# Altium PCB ebox_board_v3.PcbDoc
Units mm, origin at the board's own origin, x right, y up, seen from the top; angles counter-clockwise.
Board outline 96.52 x 82.55 mm, 2 copper layers (Top Layer, Bottom Layer); 28 components, 14 nets, 82 pads, 13 vias.
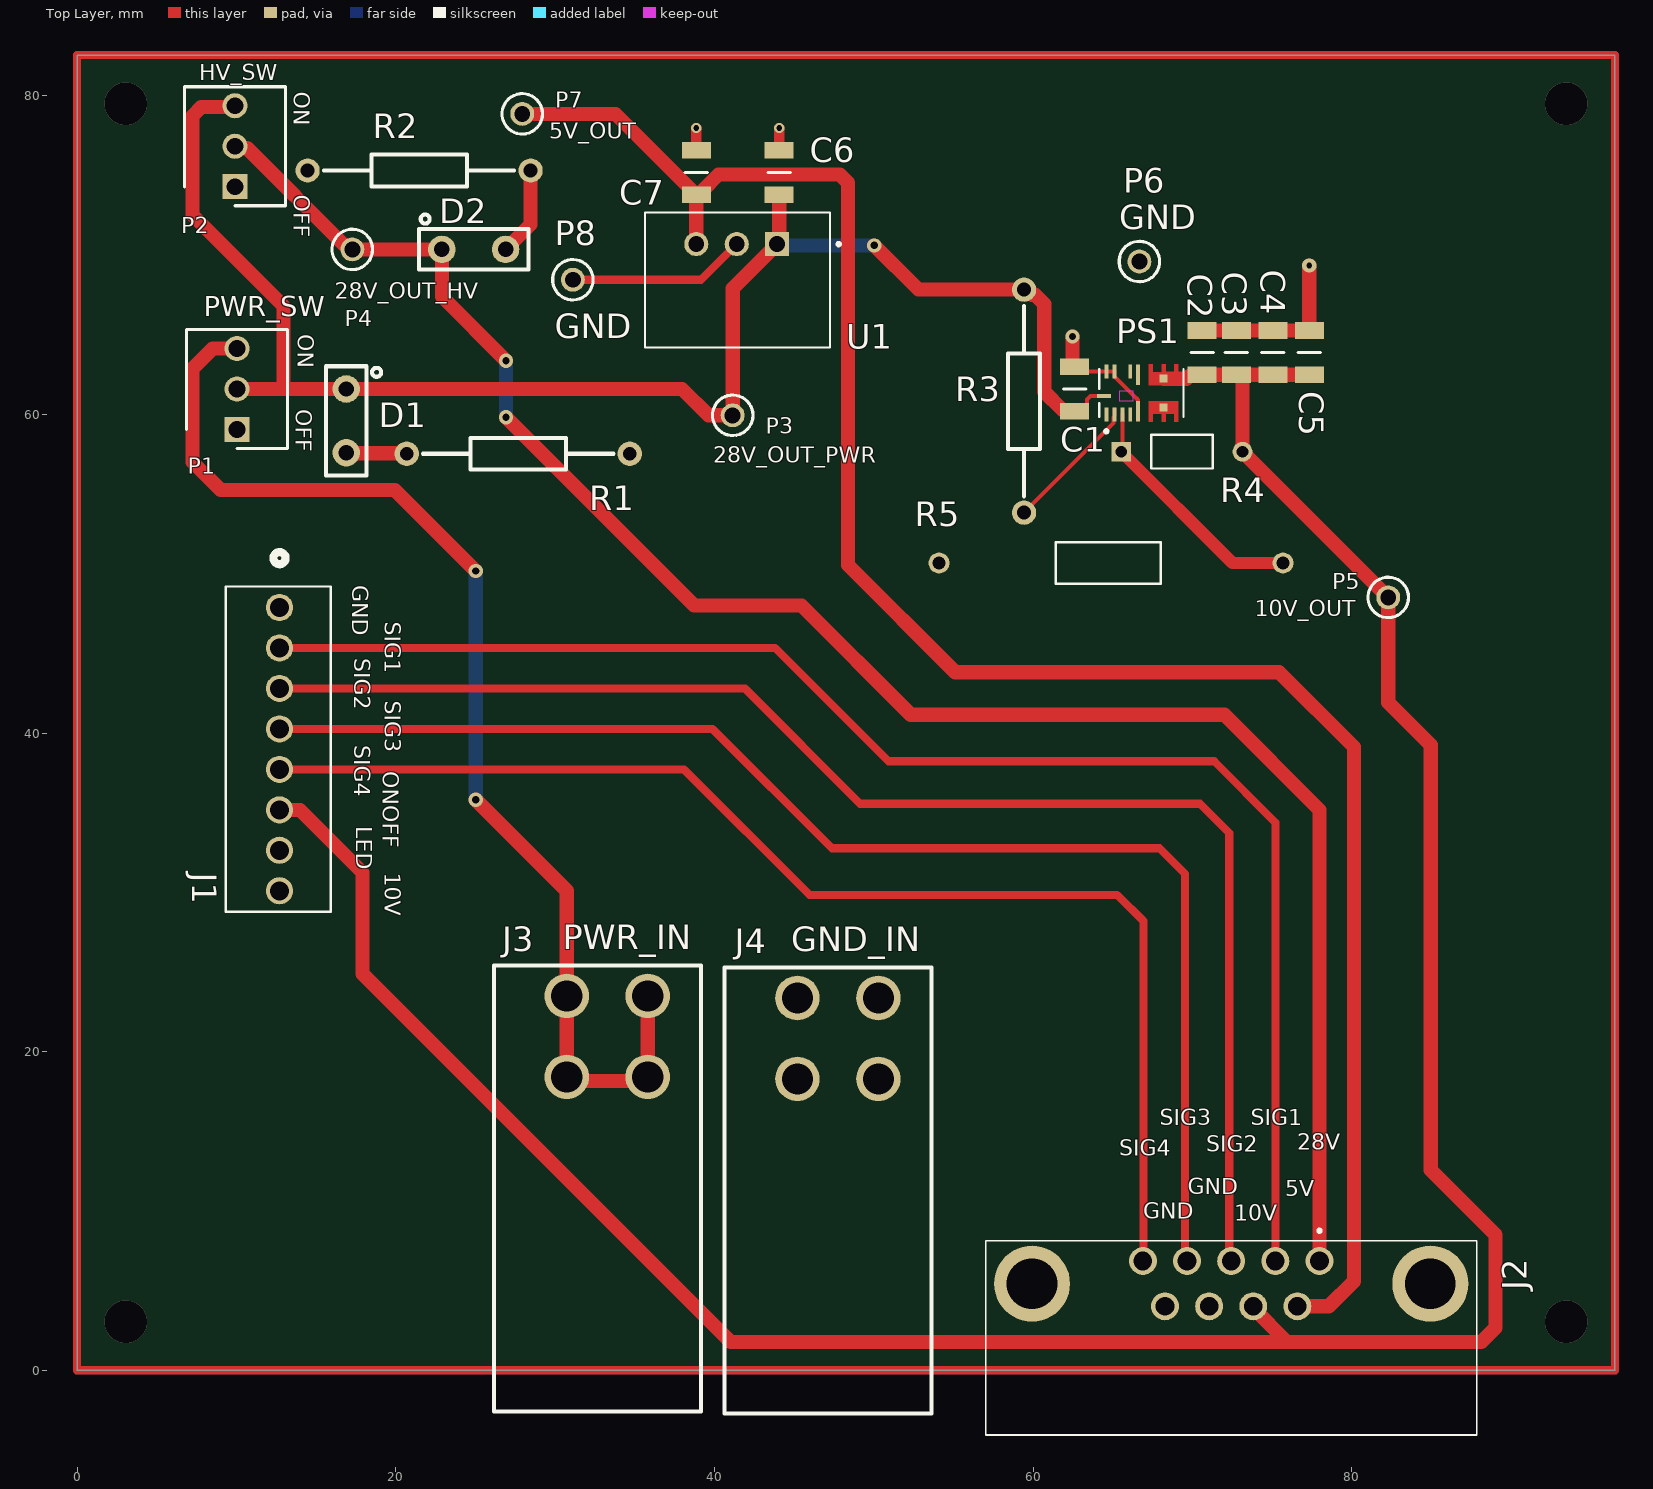
[diagram p0: Top Layer view]
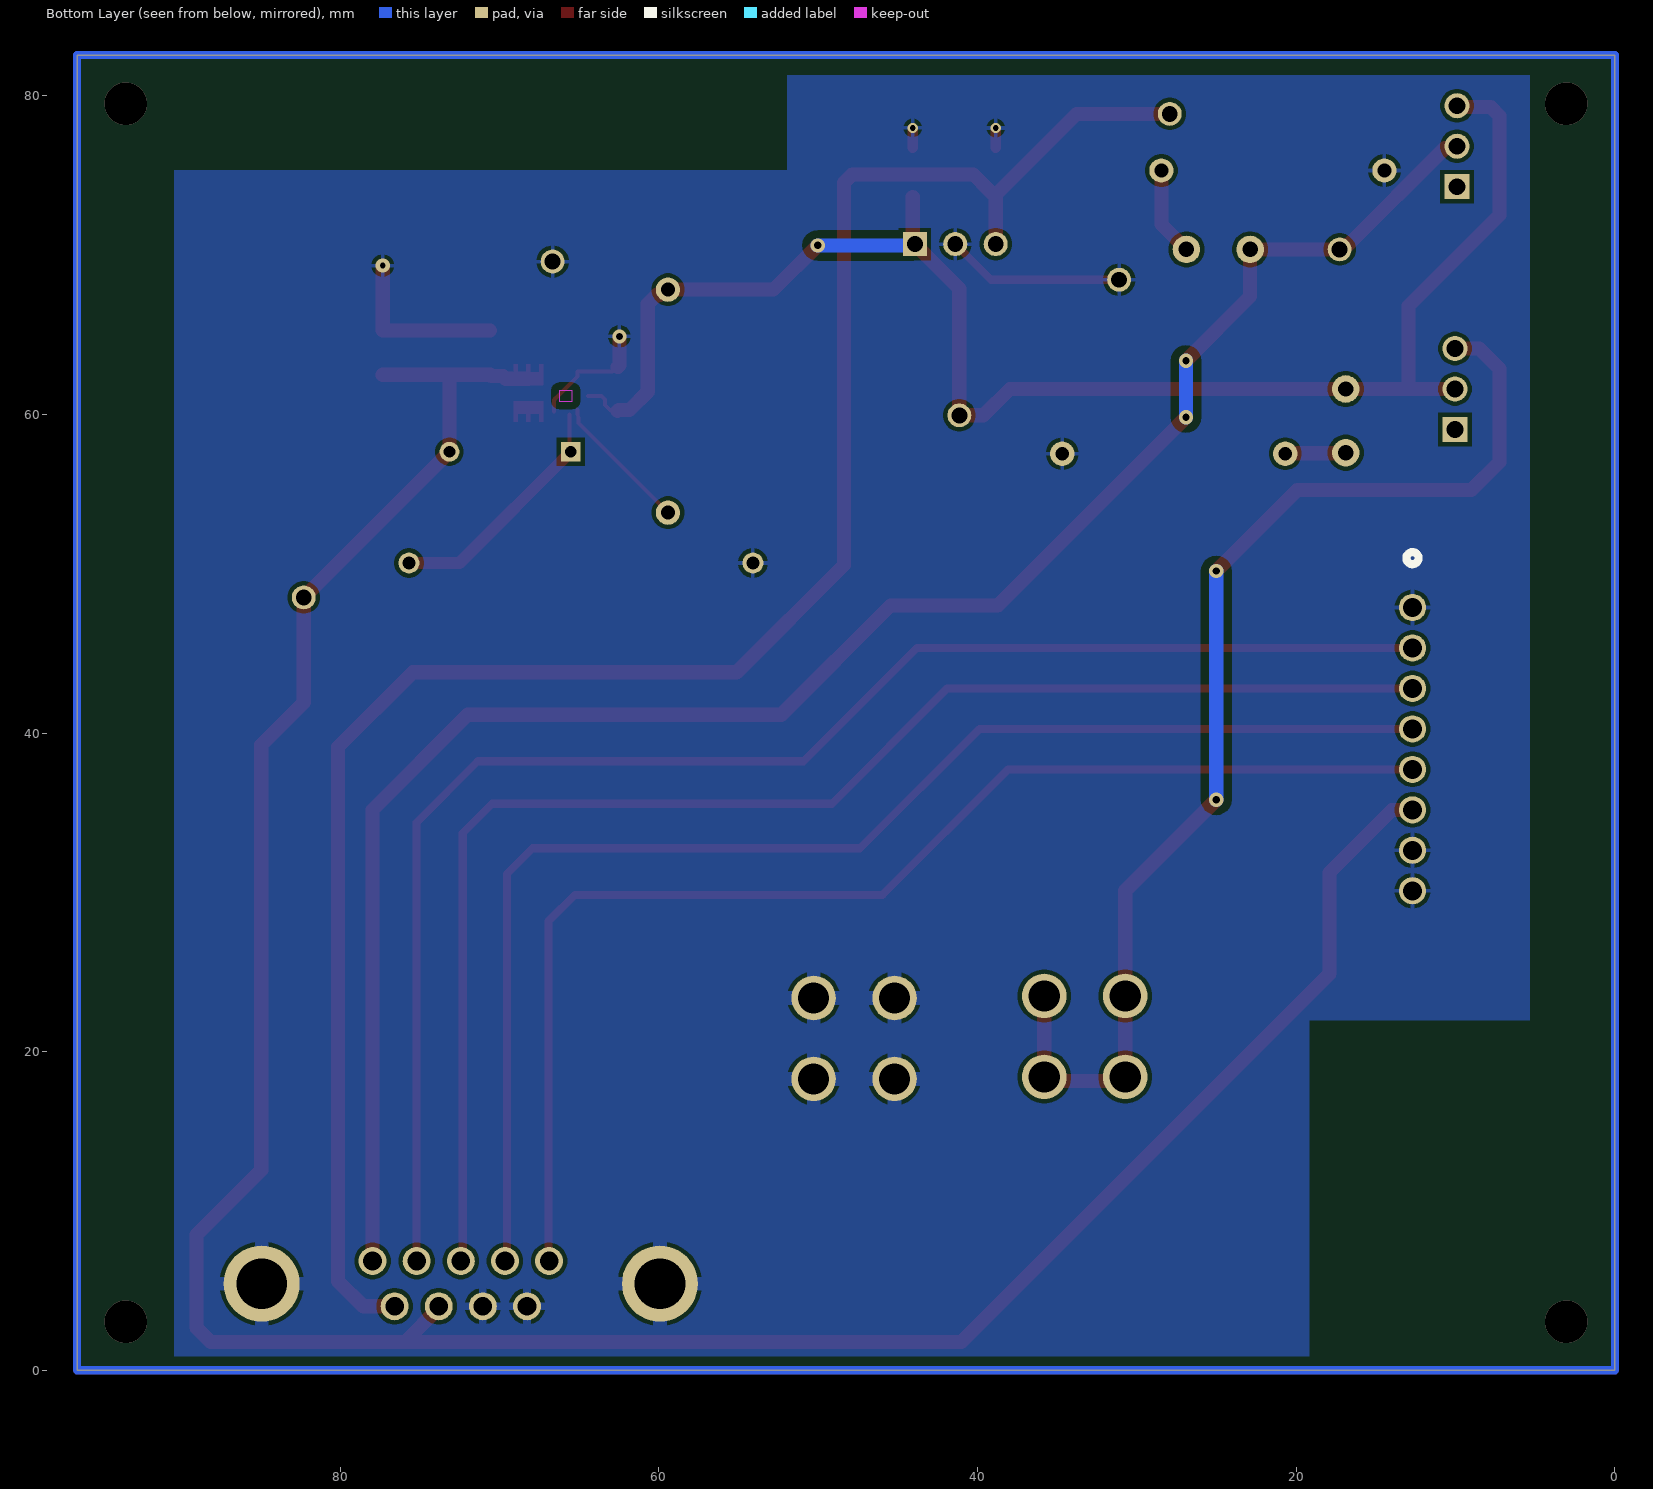
[diagram p1: Bottom Layer view, seen from below]

## Layer stack, top to bottom
Top Solder: solder mask 0.0102, Solder Resist, Dk 3.5
Top Layer: signal copper 0.0356
Dielectric 1: dielectric 0.32, FR-4, Dk 4.8
Bottom Layer: signal copper 0.0356
Bottom Solder: solder mask 0.0102, Solder Resist, Dk 3.5

## Board outline
0,0 0,82.55 96.52,82.55 96.52,0

## Design rules (kind name [scope] priority, off if disabled: settings)
Clearance polygon_clearance [All] p1: gap=0.254 ignorepadtopadclearanceinfootprint=FALSE except(0: Arc-Hole Track-Hole SMDPad-Hole THPad-Hole Via-Hole Fill-Hole Poly-Hole Region-Hole Text-Hole; 0.508: Arc-Arc Arc-Track Arc-Fill Arc-Poly Arc-Region Track-Track Track-Fill Track-Poly Track-Region Fill-Fill Fill-Poly Fill-Region Poly-Poly Poly-Region Region-Region)
Clearance [All] p2: gap=0.254 ignorepadtopadclearanceinfootprint=FALSE except(0: Arc-Hole Track-Hole SMDPad-Hole THPad-Hole Via-Hole Fill-Hole Poly-Hole Region-Hole Text-Hole)
Clearance MO [InNamedPolygon('GND_L02_P000')] p3 off: gap=0.254 ignorepadtopadclearanceinfootprint=FALSE except(0: Arc-Hole Track-Hole SMDPad-Hole THPad-Hole Fill-Hole Poly-Hole Region-Hole Text-Hole; 3.81: Arc-Via Track-Via SMDPad-Via THPad-Via Via-Via Via-Fill Via-Poly Via-Region Via-Text Via-Hole)
Clearance MOUNTING_1 [InNamedPolygon('GND_L02_P000') vs InNet('No Net')] p4 off: gap=0.254 ignorepadtopadclearanceinfootprint=FALSE except(0: Arc-Hole Track-Hole SMDPad-Hole THPad-Hole Fill-Hole Poly-Hole Region-Hole Text-Hole; 1.27: Arc-Via Track-Via SMDPad-Via THPad-Via Via-Via Via-Fill Via-Poly Via-Region Via-Text Via-Hole)
Clearance Mounting [InNamedPolygon('GND_L02_P000') vs InNet('No Net')] p5 off: gap=0.254 ignorepadtopadclearanceinfootprint=FALSE except(0: Arc-Hole Track-Hole SMDPad-Hole THPad-Hole Via-Hole Fill-Hole Poly-Hole Region-Hole Text-Hole)
PolygonConnect [All] p1: connectstyle=Relief reliefconductorwidth=0.254 reliefentries=4 polygonreliefangle="90 Angle" airgapwidth=0.254
RoomDefinition top_ebox_v3 [InComponentClass('top_ebox_v3')] p1 off: confinementstyle=ConfineIn formatcopy=TRUE lockcomponents=FALSE outline 5.969,-11.43 89.154,-11.43 89.154,81.153 5.969,81.153
RoomDefinition U_power_ebox [InComponentClass('U_power_ebox')] p2 off: confinementstyle=ConfineIn formatcopy=TRUE lockcomponents=FALSE outline 26.289,46.863 83.947,46.863 83.947,80.518 26.289,80.518
RoutingVias [All] p1: holewidth=0.711 width=1.27 viastyle="Through Hole" minholewidth=0.711 minwidth=1.27 maxholewidth=0.711 maxwidth=1.27
SolderMaskExpansion [All] p1: expansion=0.102 istentingtop=FALSE
Width [All] p1 off: maxlimit=0.254 minlimit=0.254 preferedwidth=0.254
30 further rules are at their usual default settings.

## Classes and differential pairs
component class U_power_ebox: C1 C2 C3 C4 C5 C6 C7 P5 P6 P7 P8 PS1 R3 R4 R5 U1
component class top_ebox_v3: D1 D2 J1 J2 J3 J4 P1 P2 P3 P4 R1 R2

## Components (designator, comment, footprint, x,y, rotation, side; value= is the part's Value field where it differs from the comment)
C1 "10u" "10UF CER SMD" 62.611,61.595 r90 top
C2 "10u" "10UF CER SMD" 70.612,63.881 r270 top
C3 "10u" "10UF CER SMD" 72.771,63.881 r270 top
C4 "10u" "10UF CER SMD" 75.057,63.881 r270 top
C5 "10u" "10UF CER SMD" 77.343,63.881 r270 top
C6 "10u" "10UF CER SMD" 44.069,75.184 r270 top
C7 "10u" "10UF CER SMD" 38.862,75.184 r270 top
D1 "LED" "LED 12V THRU HOLE" 16.891,59.595 r270 top
D2 "LED" "LED 12V Thru Hole" 24.892,70.358 r0 top
J1 "ARDUINO_IO" "1X8 MOLEX HEADER - FEMALE" 12.7,47.879 r270 top
J2 "EBOX_OUT" "9-PIN D-SUB" 77.978,6.858 r0 top
J3 "PWR_IN" "BANANA JACK" 30.734,23.495 r90 top
J4 "GND_IN" "BANANA JACK" 45.212,23.368 r90 top
P1 "PWR_SW" "3X1 KK MOLEX" 10.033,59.055 r90 top
P2 "HV_SW" "3X1 KK MOLEX" 9.906,74.295 r90 top
P3 "28V_OUT_PWR" KSTN-5003 41.148,59.944 r0 top
P4 "28V_OUT_HV" KSTN-5003 17.272,70.358 r0 top
P5 "10V_OUT" KSTN-5003 82.296,48.514 r0 top
P6 "GND" KSTN-5003 66.675,69.596 r0 top
P7 "5V_OUT" KSTN-5003 27.94,78.867 r0 top
P8 "GND" KSTN-5003 31.115,68.453 r0 top
PS1 "*" "10V STEP-DOWN" 66.802,61.341 r90 top
R1 "1.5k" "GENERAL RESISTOR" 27.686,57.531 r0 top
R2 "1.5k" "GENERAL RESISTOR" 21.463,75.311 r180 top
R3 "100K" "GENERAL RESISTOR" 59.436,60.833 r90 top
R4 "75K" 75K 65.532,57.658 r0 top
R5 "6.65K" 6.65K 95.885,50.673 r180 top
U1 "R-78E5.0-1.0" "STEP-DOWN CONVERTER" 41.402,68.438 r180 top

## Footprints (in the part's own frame and the unit in brackets; to place one, negate y for a bottom-side part, rotate by r counter-clockwise, add the part's x,y. Pads: shape width x height; smd on the part's side, far side on the other; paste and mask are expansions set on the pad)
"1X8 MOLEX HEADER - FEMALE" [mil] "CONN_171856-0008_MOL"
  round 67 hole 47 mask+0: 1(0,0) 2(100,0) 3(200,0) 4(300,0) 5(400,0) 6(500,0) 7(600,0) 8(700,0)
  silkscreen extent -137,-133 752,127, body extent 0,0 10,10, height 10
"3X1 KK MOLEX" [mm] "22112032 - HDRV3W87P0X254_1X3_747X635X1105P"
  rect 1.575x1.575 hole 1.05: 1(0,0)
  round 1.575 hole 1.05: 2(2.54,0) 3(5.08,0)
  silkscreen extent -1.19,-3.17 6.27,3.18, body extent -1.19,-3.24 6.27,3.11, height 10.65
6.65K [mil]
  round 52 hole 32 mask+0: 1(795,0) 2(1645,0)
  silkscreen extent 1097,-51 1357,52
"9-PIN D-SUB" [mm] "23117651"
  round 1.755 hole 1.17: 1(0,0) 2(-2.77,0) 3(-5.54,0) 4(-8.31,0) 5(-11.08,0) 6(-1.385,-2.84) 7(-4.155,-2.84) 8(-6.925,-2.84) 9(-9.695,-2.84)
  round 4.77 hole 3.18: MH1(-18.04,-1.42) MH2(6.96,-1.42)
  silkscreen extent -20.95,-10.92 9.86,2, body extent -20.95,-16.92 9.87,1.28, height 12.63
"10UF CER SMD" [mm] "CAPC3216X180N"
  rect 1.05x1.82 smd: 1(-1.39,0) 2(1.39,0)
  silkscreen extent 0,-0.7 0,0.7, body extent -1.6,-0.8 1.6,0.8, height 1.8
"10V STEP-DOWN" [mm]
  rect 0.9x0.25 smd: 1(-1.35,2.2) 2(-1.35,1.7) 3(-1.35,1.2) 4(-1.35,0.7) 13(1.35,0.7) 14(1.35,1.7) 15(1.35,2.2)
  rect 1.3x0.25 smd: 5(-1.15,0.2) 12(1.15,0.2)
  rect 0.5x0.5 smd paste-1 mask+0: 6_7_8(-0.9,-1.4) 9_10_11(0.9,-1.4)
  rect 0.25x0.9 smd: 16(-0.175,2.35)
  Top Layer region: -0.5,-2.325 -1.8,-2.325 -1.8,-2.075 -1.3,-2.075 -1.3,-1.525 -1.8,-1.525 -1.8,-1.275 -1.3,-1.275 -1.3,-0.725 -1.8,-0.725 -1.8,-0.475 -0.5,-0.475
  Top Layer region: 1.8,-0.725 1.3,-0.725 1.3,-1.275 1.8,-1.275 1.8,-1.525 1.3,-1.525 1.3,-2.075 1.8,-2.075 1.8,-2.325 0.5,-2.325 0.5,-0.475 1.8,-0.475
  Keep-Out Layer region: 0.15,0.55 -0.5,0.55 -0.5,1.35 0.15,1.35
  Keep-Out Layer region: 0.15,0.55 -0.5,0.55 -0.5,1.35 0.15,1.35
  silkscreen extent -2.5,-2.65 1.5,2.65
75K [mil]
  rect 49x49 hole 29 mask+0: 1(0,0)
  round 49 hole 29 mask+0: 2(300,0)
  silkscreen extent 74,-42 226,42, body extent 0,0 10,10, height 10
"BANANA JACK" [mil] "Female"
  round 110 hole 77: 1(0,0) 2(0,-200) 3(-200,-200) 4(-200,0)
  silkscreen extent -1027,-332 75,180
"GENERAL RESISTOR" [mil]
  round 60 hole 34.17: 1(-275.59,0) 2(275.59,0)
  silkscreen extent -235,-39 235,39
KSTN-5003 [mm] "Test Point, Through Hole, Dia 2.54mm"
  round 1.5 hole 1: 1(0,0)
  silkscreen extent -1.27,-1.27 1.27,1.27, body extent -1.27,-1.27 1.27,1.27, height 4.57
"LED 12V THRU HOLE" [mm] "609-1112-130F"
  round 1.727 hole 0.965: 1(-2,0) 2(2,0)
  silkscreen extent -3.43,-1.27 3.43,2.19
"LED 12V Thru Hole" [mm] "609-1112-130F"
  round 1.727 hole 0.965: 1(-2,0) 2(2,0)
  silkscreen extent -3.43,-1.27 3.43,2.19
"STEP-DOWN CONVERTER" [mm] "CONV_R-78E5.0-1.0"
  rect 1.508x1.508 hole 1: 1(-2.54,-2.25)
  round 1.508 hole 1: 2(0,-2.25) 3(2.54,-2.25)
  silkscreen extent -6.5,-4.25 5.75,4.25

## Part data
C1 C2 C3 C4 C5 C6 C7: library part "Capacitor - Ceramic"
J1: library part 207843-0008, "KK Molex 1x8 Header", Manufacturer_Name=Molex, Mouser Part Number=538-207843-0008, Datasheet Link=https://www.molex.com/pdm_docs/sd/2078430008_sd.pdf, Height=6.95mm, Manufacturer_Part_Number=207843-0008, Mouser Price/Stock=https://www.mouser.co.uk/ProductDetail/Molex/207843-0008?qs=XeJtXLiO41QJV3n1oae5pg%3D%3D
J2: library part 2311765-1, "Connector", Manufacturer_Name="TE Connectivity", Mouser2 Part Number=571-2311765-1, Datasheet Link=https://componentsearchengine.com//2311765-1.pdf, Height=12.8mm, Manufacturer_Part_Number=2311765-1, Mouser2 Price/Stock=https://www.mouser.com/Search/Refine.aspx?Keyword=571-2311765-1
J3 J4: library part "Banana Jack", "Female"
P1 P2: library part "KK 254 1x3 male header", "22112032"
P3 P4 P5 P6 P7 P8: library part CMP-002-00037-2, "Test Point, Orange, Height 4.6 mm, Tail Length 3 mm, 1-Pin THD, RoHS", Case/Package=5003, Colour=Orange, Manufacturer=Keystone, Package Description="1-Pin Through Hole Device, Dia 2.54 mm", Package Quantity=10, Connector Type=TestPoint, Contact Material=Bronze, Contact Plating=Tin, Datasheet URL=http://keyelco.com/userAssets/file/M65p56.pdf, Datasheet Version=Jun-15, Diameter=2.54mm, Manufacturer URL=http://www.keyelco.com/, Mounting Technology=TH, Package Reference=5003, Packaging=Bulk, Pins=1, RoHS Compliant=True
PS1: library part "10V Step-Down", "Non-Isolated DC/DC Converters 4-36Vin 0.8-24Vout 1.5A", Package=None, Availability=Warning, Check_prices=https://www.snapeda.com/parts/RPX-1.5-R/Recom%20Power/view-part/5138341/?ref=eda, MF="Recom Power", MP=RPX-1.5-R, Price=None, Purchase-URL=https://pricing.snapeda.com/search/part/RPX-1.5-R/?ref=eda, SnapEDA_Link=https://www.snapeda.com/parts/RPX-1.5-R/Recom%20Power/view-part/5138341/?ref=snap
R1 R2 R3 R4 R5: library part Resistor
U1: library part "Step-down Converter"

## Via types
v1: diameter 0.889, hole 0.457, Top Layer to Bottom Layer, tented both sides, 5 vias
v2: diameter 2.667, hole 2.667, Top Layer to Bottom Layer, 4 vias
v3: diameter 0.635, hole 0.356, Top Layer to Bottom Layer, tented both sides, 2 vias
v4: diameter 0.889, hole 0.356, Top Layer to Bottom Layer, 1 vias
v5: diameter 0.889, hole 0.457, Top Layer to Bottom Layer, 1 vias

## Nets (pads, with @x,y where several pads share a name; then routed paths per layer and width w, separated by ;. In a path a pad name is that pad's centre, name@x,y a point inside that pad or via, vN(x,y) a via of type N, cw(c..) or ccw(c..) an arc to the next point about the centre after c; other vN are vias at no path point)
5V: C7.2 J2.6 P7.1 U1.3 | length 124.6
  Top Layer w0.508: P7.1@27.603,78.867 P7.1
  Top Layer w0.889: P7.1 33.793,78.867 C7.2@38.721,73.939 ; U1.3 C7.2@38.862,73.656 ; C7.2@38.879,73.673 39.234,74.028 39.234,74.032 40.259,75.057 47.866,75.057 48.387,74.536 48.387,50.546 55.118,43.815 75.438,43.815 80.137,39.116 80.137,5.588 78.567,4.018 J2.6
10V: C2.2 C3.2 C4.2 C5.2 J1.6 J2.7 P5.1 PS1.9_10_11 R4.2 | length 173
  Top Layer w0.889: J1.6 12.721,35.158 13.991,35.158 17.907,31.242 17.907,24.892 41.021,1.778 75.946,1.778 ; PS1.9_10_11 69.626,62.241 69.795,62.411 70.531,62.411 C2.2 C3.2 C3.2@73.071,62.491 ; J2.7 73.823,3.901 75.946,1.778 ; C5.2@77.343,62.484 77.339,62.488 75.061,62.488 C4.2 C3.2@73.071,62.491 ; C3.2@73.071,62.491 73.152,62.411 R4.2 P5.1 82.296,41.91 84.963,39.243 84.963,12.573 89.027,8.509 89.027,2.667 88.138,1.778 75.946,1.778
28V: J3.1 J3.2 J3.3 J3.4 P1.3 | length 73.8
  Top Layer w0.889: P1.3 8.509,64.135 7.239,62.865 7.239,57.023 9.017,55.245 19.939,55.245 v1(25.019,50.165) ; v1(25.019,35.814) 30.734,30.099 J3.1 J3.4 ; J3.4@30.988,18.161 J3.3@35.814,18.161 ; J3.3 J3.2
  Bottom Layer w0.889: v1(25.019,35.814) v1(25.019,50.165)
28V_OUT_HV: D2.1 J2.1 P2.2 P4.1 | length 117.5
  Top Layer w0.889: P2.2 10.037,76.704 10.672,76.704 16.712,70.664 16.801,70.664 17.107,70.358 D2.1 22.892,67.405 v1(26.924,63.373) ; v1(26.924,59.817) 38.735,48.006 45.466,48.006 52.324,41.148 72.009,41.148 77.978,35.179 J2.1
  Bottom Layer w0.889: v1(26.924,59.817) v1(26.924,63.373)
28V_OUT_PWR: C1.1 C6.2 D1.1 P1.2 P2.3 P3.1 PS1.16 R3.2 U1.1 | length 97.8
  Top Layer w0.254: C1.1 62.996,60.205 63.394,60.603 63.394,60.939 63.621,61.166 PS1.16
  Top Layer w0.889: P2.3 9.817,79.286 7.785,79.286 7.239,78.74 7.239,72.517 12.954,66.802 12.954,61.595 ; P1.2 12.954,61.595 ; C6.2@44.069,73.656 44.069,70.815 U1.1 41.148,67.894 P3.1 39.624,59.944 37.973,61.595 D1.1 12.954,61.595 ; v1(50.038,70.612) 52.817,67.833 R3.2 59.608,67.833 59.925,67.515 60.127,67.515 60.706,66.936 60.706,61.427 61.847,60.286 62.53,60.286 C1.1
  Bottom Layer w0.254: U1.1 U1.1@44.018,70.612
  Bottom Layer w0.889: U1.1@44.018,70.612 v1(50.038,70.612)
GND: C1.2 C2.1 C3.1 C4.1 C5.1 C6.1 C7.1 J1.1 J1.7 J1.8 J2.8 J2.9 J2.MH1 J2.MH2 J4.1 J4.2 J4.3 J4.4 P6.1 P8.1 PS1.5 PS1.14 PS1.15 R1.2 R2.2 R5.2 U1.2 | length 32.3
  Top Layer w0.254: C1.2 62.905,62.691 PS1.15 PS1.14 65.102,62.511 ccw(c65.356,62.511) 65.176,62.332 66.526,60.982 cw(c66.346,60.803) 66.6,60.803 66.6,60.193 PS1.5
  Top Layer w0.508: P8.1 39.167,68.453 U1.2
  Top Layer w0.635: C7.1@38.862,76.712 v3(38.862,77.978) ; C6.1@44.069,76.712 v3(44.069,77.982)
  Top Layer w0.889: v5(62.484,64.897) 62.484,63.065 62.565,62.985 C1.2 ; C2.1 C3.1 C4.1 C5.1 v4(77.343,69.342)
NetD1_2: D1.2 R1.1 | length 3.8
  Top Layer w0.254: D1.2 D1.2@16.923,57.563 ; R1.1@20.654,57.563 R1.1
  Top Layer w0.889: D1.2@16.923,57.563 R1.1@20.654,57.563
NetD2_2: D2.2 R2.1 | length 5.6
  Top Layer w0.889: D2.2 28.463,71.929 R2.1
NetPS1_2: PS1.2 R3.1 | length 8.7
  Top Layer w0.076: PS1.2@65.102,60.312 PS1.2@65.151,60.361
  Top Layer w0.254: R3.1@59.421,53.848 R3.1 65.054,59.451 PS1.2@65.054,59.805 ; PS1.2 PS1.2@65.102,60.312
NetPS1_3: PS1.3 R4.1 R5.1 | length 15.4
  Top Layer w0.254: PS1.3 65.604,59.989 R4.1@65.604,57.658
  Top Layer w0.762: R4.1 72.517,50.673 R5.1
SIG1: J1.2 J2.2 | length 94.6
  Top Layer w0.508: J1.2 43.815,45.339 50.927,38.227 71.374,38.227 75.208,34.393 J2.2
SIG2: J1.3 J2.3 | length 90.3
  Top Layer w0.508: J1.3 41.91,42.799 49.149,35.56 70.485,35.56 72.317,33.728 72.317,6.979 J2.3
SIG3: J1.4 J2.4 | length 85
  Top Layer w0.508: J1.4 39.878,40.259 47.371,32.766 67.945,32.766 69.547,31.164 69.547,6.979 J2.4
SIG4: J1.5 J2.5 | length 79.5
  Top Layer w0.508: J1.5 38.1,37.719 45.974,29.845 65.278,29.845 66.929,28.194 66.929,6.889 J2.5
pads on no net: P1.1 P2.1 PS1.1 PS1.4 PS1.6_7_8 PS1.12 PS1.13
copper on no net:
  other v2: 3.048,3.048 93.472,3.048 3.048,79.502 93.472,79.502

## Polygon pours and split planes (outlines as drawn)
GND on Bottom Layer "GND_L02_P000" (solid, pour order 0): 5.334,81.28 5.334,21.971 19.177,21.971 19.177,0.889 90.424,0.889 90.424,75.311 51.943,75.311 51.943,81.28

## Other copper
Multi-Layer:
  lines w0.508: 0,0 0,82.55 96.52,82.55 96.52,56.96 96.52,15.685 96.52,0 0,0

## Silkscreen, mask and mechanical layers (free items; w line width, h text height)
Top Overlay:
  text "ON" at 13.589,80.264 h1.02 r270
  text "OFF" at 13.589,73.787 h1.02 r270
  text "ON" at 13.843,65.024 h1.02 r270
  text "OFF" at 13.716,60.325 h1.02 r270
  text "GND" at 17.272,49.276 h1.02 r270
  text "SIG1" at 19.304,46.99 h1.02 r270
  text "SIG2" at 17.399,44.704 h1.02 r270
  text "SIG3" at 19.304,42.037 h1.02 r270
  text "SIG4" at 17.399,39.243 h1.02 r270
  text "ONOFF" at 19.177,37.592 h1.02 r270
  text "LED" at 17.526,34.163 h1.02 r270
  text "10V" at 19.304,31.242 h1.02 r270
  text "SIG3" at 67.945,15.367 h1.02
  text "SIG1" at 73.66,15.367 h1.02
  text "28V" at 76.581,13.843 h1.02
  text "SIG2" at 70.866,13.716 h1.02
  text "SIG4" at 65.405,13.462 h1.02
  text "GND" at 69.723,11.049 h1.02
  text "5V" at 75.819,10.922 h1.02
  text "GND" at 66.929,9.525 h1.02
  text "10V" at 72.644,9.398 h1.02